# Altium PCB PCB1.PcbDoc
Units mil, origin at the board's own origin, x right, y up, seen from the top; angles counter-clockwise.
Board outline 1045 x 1985 mil, 2 copper layers (Top Layer, Bottom Layer); 7 components, 8 nets, 23 pads, 10 vias.
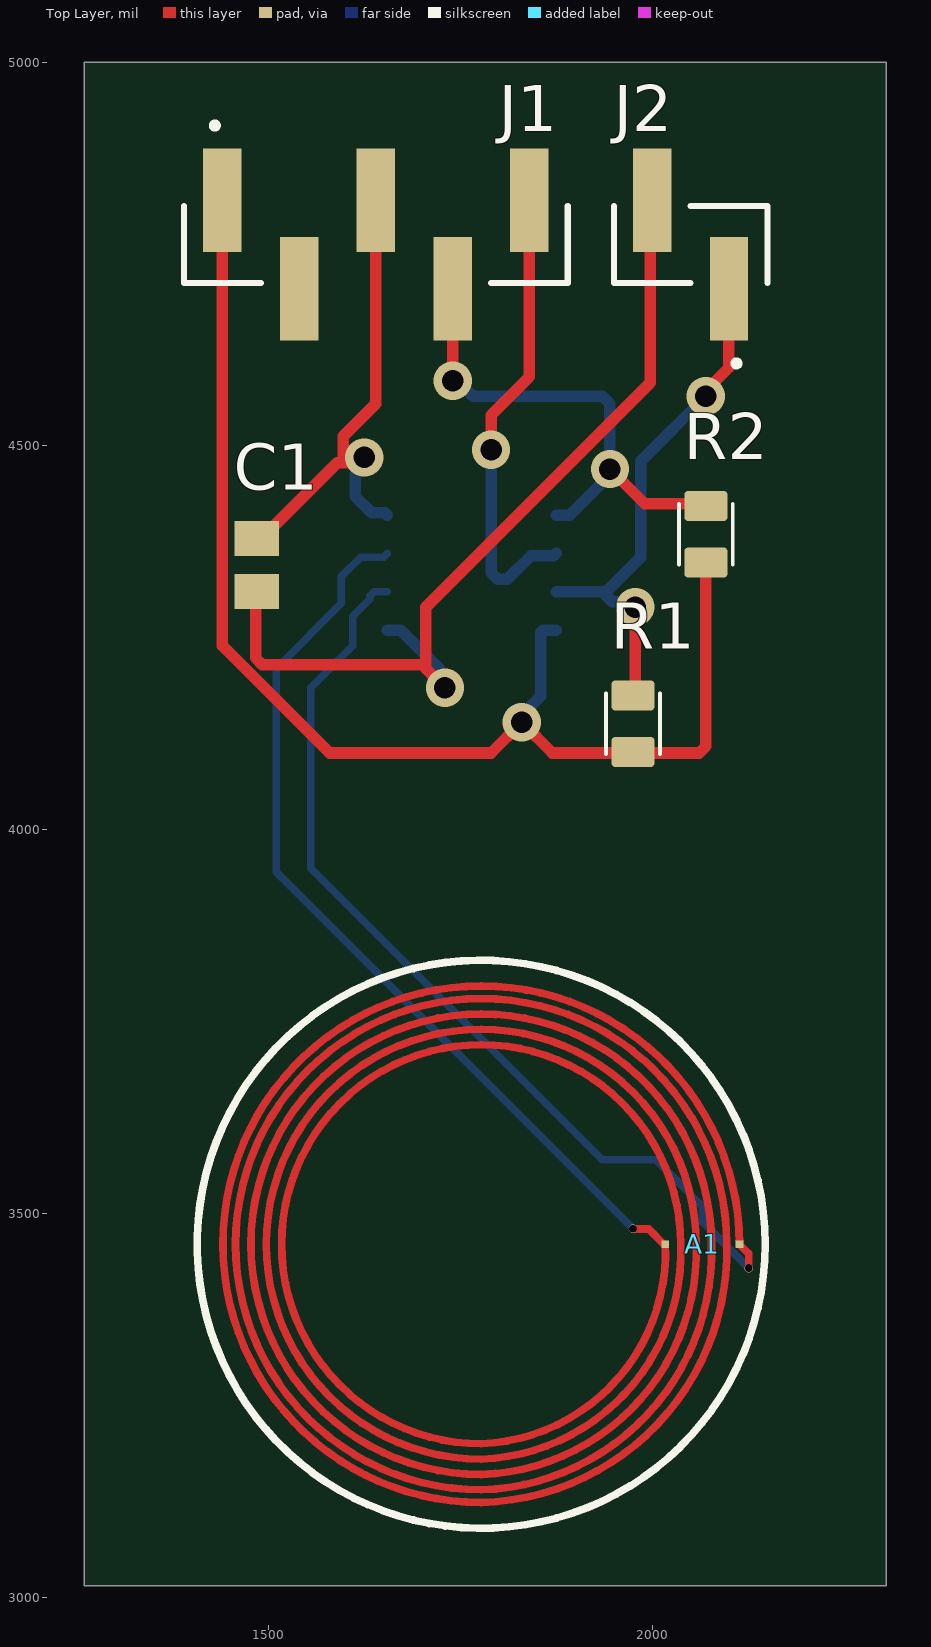
[diagram p0: Top Layer view]
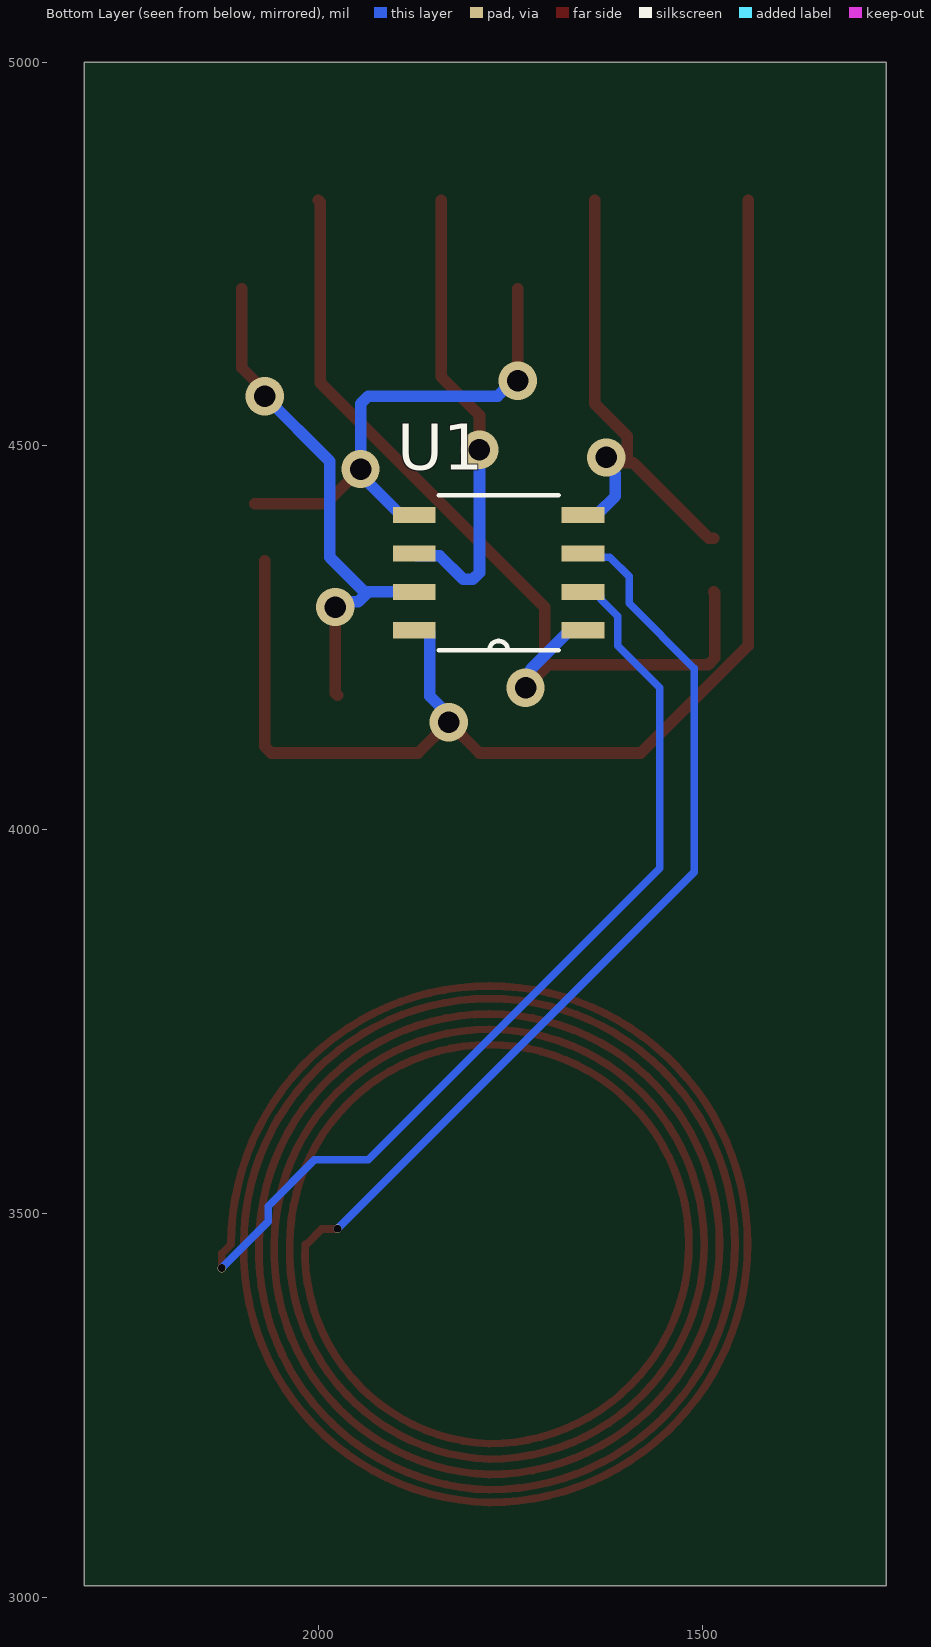
[diagram p1: Bottom Layer view, seen from below]

## Layer stack, top to bottom
Top Solder: solder mask 0.4, Solder Resist, Dk 3.5
Top Layer: signal copper 1.4
Dielectric 1: dielectric 12.6, FR-4, Dk 4.8
Bottom Layer: signal copper 1.4
Bottom Solder: solder mask 0.4, Solder Resist, Dk 3.5

## Board outline
1260,3015 2305,3015 2305,5000 1260,5000

## Design rules (kind name [scope] priority, off if disabled: settings)
Clearance [All] p1: gap=1 ignorepadtopadclearanceinfootprint=TRUE
NetAntennae [All] p1: netantennaetolerance=10
PolygonConnect [All] p1: connectstyle=Relief reliefconductorwidth=10 reliefentries=4 polygonreliefangle="90 Angle" airgapwidth=10
RoutingVias [All] p1: holewidth=28 width=50 viastyle="Through Hole" minholewidth=6 minwidth=6 maxholewidth=28 maxwidth=50
ShortCircuit [All] p1: allowed=TRUE
SilkToSolderMaskClearance [IsPad] p1: minsilkscreentomaskgap=0.1 clearancetoexposedcopper=FALSE
SolderMaskExpansion [All] p1: expansion=4 istentingtop=FALSE
Width [All] p1: maxlimit=20 minlimit=1 preferedwidth=10 minimp=50.000000 maximp=50.000000 favimp=50.000000
27 further rules are at their usual default settings.

## Components (designator, comment, footprint, x,y, rotation, side; value= is the part's Value field where it differs from the comment)
A1 "Antena 13.56 Mhz" PCB_ANTENNA 1777.2,3460 r0 top
C1 "10nF" CAPC2012X140N 1485,4345 r90 top
J1 "TSM-105-02-S-SV" SAMTEC_TSM-105-02-S-SV 1640,4762.52 r180 top
J2 "TSM-102-02-S-SV" SAMTEC_TSM-102-02-S-SV 2050,4762.52 r0 top
R1 "20K" RESC2012X65N 1975,4138.19 r270 top
R2 "open" RESC2012X65N 2070,4385 r270 top
U1 "M24LR64-RMN6/2" SOIC127P600X175-8N 1765,4335 r0 bottom

## Footprints (in the part's own frame and the unit in brackets; to place one, negate y for a bottom-side part, rotate by r counter-clockwise, add the part's x,y. Pads: shape width x height; smd on the part's side, far side on the other; paste and mask are expansions set on the pad)
CAPC2012X140N [mm]
  rect 1.16x1.47 smd: 1(-0.88,0) 2(0.88,0)
PCB_ANTENNA [mil]
  rect 10x10 smd: 1(336.44,0) 2(240,0)
  Top Layer lines w10: 240,0 cw(c-10,-10) 0,-260 cw(c0,0) -260,0 cw(c0,0) 0,260 cw(c0,0) 260,0 cw(c-10,-10) 0,-280 cw(c0,0) -280,0 cw(c0,0) 0,280 cw(c0,0) 280,0 cw(c-10,-10) 0,-300 cw(c0,0) -300,0 cw(c0,0) 0,300 cw(c0,0) 300,0 ; 336.44,0 ccw(c0,0) 0,336.44 ccw(c0,0) -336.44,0 ccw(c0,0) 0,-336.44 ccw(c-8.22,-8.22) 320,0 ; 300,0 ccw(c0,0) 300,0 ; 300,0 cw(c-10,-10) 0,-320 cw(c0,0) -320,0 cw(c0,0) 0,320 cw(c0,0) 320,0 ; 320,0 ccw(c0,0) 320,0
  silkscreen extent -370,-370 370,370
RESC2012X65N [mm]
  rrect25% 1x1.42 smd: 1(-0.935,0) 2(0.935,0)
  silkscreen extent -1,-0.89 1,0.89
SAMTEC_TSM-102-02-S-SV [mm]
  rect 1.27x3.43 smd: 01(1.27,-1.46) 02(-1.27,1.46)
  silkscreen extent -2.54,-4.03 2.54,1.27, body extent -2.54,-2.67 2.54,2.54, height 11.95
SAMTEC_TSM-105-02-S-SV [mm]
  rect 1.27x3.43 smd: 01(5.08,-1.46) 02(2.54,1.46) 03(0,-1.46) 04(-2.54,1.46) 05(-5.08,-1.46)
  silkscreen extent -6.35,-4.03 6.35,1.27, body extent -6.35,-2.6 6.35,2.6, height 11.95
SOIC127P600X175-8N [mil]
  rect 56x21 smd: 1(-110,75) 2(-110,25) 3(-110,-25) 4(-110,-75) 5(110,-75) 6(110,-25) 7(110,25) 8(110,75)
  silkscreen extent -78,-101 78,101, body extent -118,-96 118,96, height 60

## Part data
A1: library part PCB_ANTENNA, "Antenna 13.56 Mhz"
C1: library part 08053G334ZAT2A, "Cap Ceramic 10nF", Package=None, Availability=Unavailable, MP=08053G334ZAT2A, Price=None
J1: "Conn Unshrouded Header HDR 5 POS 2.54mm Solder ST SMD Tube", Package=None, Availability="In Stock", Check_prices=https://www.snapeda.com/parts/TSM-105-02-S-SV/Samtec/view-part/?ref=eda, MF=Samtec, MP=TSM-105-02-S-SV, Price=None, Purchase-URL=https://pricing.snapeda.com/search/part/TSM-105-02-S-SV/?ref=eda, SnapEDA_Link=https://www.snapeda.com/parts/TSM-105-02-S-SV/Samtec/view-part/?ref=snap
J2: "Conn Unshrouded Header HDR 2 POS 2.54mm Solder ST SMD T/R", Package=None, Availability=Unavailable, Check_prices=https://www.snapeda.com/parts/TSM-102-02-S-SV-P-TR/Samtec%20Inc./view-part/3255768/?ref=eda, MF="Samtec Inc.", MP=TSM-102-02-S-SV-P-TR, Price=None, Purchase-URL=https://pricing.snapeda.com/search/part/TSM-102-02-S-SV-P-TR/?ref=eda, SnapEDA_Link=https://www.snapeda.com/parts/TSM-102-02-S-SV-P-TR/Samtec%20Inc./view-part/3255768/?ref=snap
R1: library part 1676221-2, "RN 0805 20K 0.1% 10PPM 1KRL", Package=None, Availability=Unavailable, MP=1676221-2, Price=None
R2: library part 1676221-2, Package=None, Availability=Unavailable, MP=1676221-2, Price=None
U1: "64 Kbit EEPROM", Package=None, Availability=Unavailable, MP=M24LR64-RMN6-2, Price=None

## Via types
v1: diameter 50, hole 28, Top Layer to Bottom Layer, 8 vias
v2: diameter 11, hole 10, Top Layer to Bottom Layer, 2 vias

## Nets (pads, with @x,y where several pads share a name; then routed paths per layer and width w, separated by ;. In a path a pad name is that pad's centre, name@x,y a point inside that pad or via, vN(x,y) a via of type N, cw(c..) or ccw(c..) an arc to the next point about the centre after c; other vN are vias at no path point)
GND: C1.2 J1.03 U1.4 | length 643.6
  Top Layer w15: C1.2 1491.1,4379.65 1495.2,4383.74 1589.76,4478.3 1597.5,4478.3 1618.3,4478.3 v1(1625,4485) ; 1597.5,4485 1597.5,4512.5 1640,4555 J1.03
  Bottom Layer w15: v1(1625,4485) 1625,4475.53 1613.29,4463.82 1613.29,4434.21 1634.5,4413 1652,4413 U1.4
NetA1_1: A1.1 U1.2 | length 1246.3
  Top Layer w10: A1.1 2125.81,3447.84 2125.81,3429.19 v2(2126,3429)
  Bottom Layer w10: U1.2 1637.5,4310 1632,4304.5 1632,4300.14 1610,4278.14 1610,4240 1555,4185 1555,3950 1935,3570 2005,3570 2065.4,3509.6 2065.4,3489.6 v2(2126,3429)
NetA1_2: A1.2 U1.3 | length 1200.7
  Top Layer w10: v2(1975,3480) 1975.19,3479.81 1995.31,3479.81 2015.12,3460 A1.2
  Bottom Layer w10: U1.3 1650.14,4355.14 1620.14,4355.14 1595,4330 1595,4295 1510,4210 1510,3945 v2(1975,3480)
NetC1_1: C1.1 J2.02 U1.1 | length 1191.6
  Top Layer w15: C1.1 1483.18,4308.54 1483.18,4223.79 1491.97,4215 1700,4215 ; v1(1730,4185) 1705,4210 1705,4290 1997.5,4582.5 1997.5,4817.5 J2.02
  Bottom Layer w15: U1.1 1672.5,4260 1723.3,4209.2 1723.3,4191.7 v1(1730,4185)
NetJ1_04: J1.04 R2.1 U1.5 | length 670.4
  Top Layer w15: v1(1740,4585) J1.04 ; v1(1945,4470) 1990,4425 R2.1@2082.56,4425
  Bottom Layer w15: v1(1740,4585) 1746.29,4585 1766.29,4565 1935,4565 1945,4555 v1(1945,4470) ; U1.5 1892.5,4410 v1@1945,4462.5
NetJ1_05: J1.05 U1.6 | length 608.3
  Top Layer w15: v1(1790,4495) 1790,4540 1840,4590 J1.05
  Bottom Layer w15: v1(1790,4495) 1790,4335 1798.79,4326.21 1811.21,4326.21 1842,4357 1872,4357 U1.6
NetJ2_01: J2.01 R1.1 U1.7 | length 693.6
  Top Layer w15: R1.1 1977.74,4177.74 1977.74,4290.12 v1(1977.69,4290.18) ; v1(2070,4565) 2070,4572.18 2100,4602.18 J2.01
  Bottom Layer w15: U1.7 1892.5,4310 1940,4310 1985,4355 1985,4480 v1(2070,4565) ; 1935,4310 1948.13,4296.87 1970.99,4296.87 v1(1977.69,4290.18)
VCC: J1.01 R1.2 R2.2 U1.8 | length 1695.2
  Top Layer w15: J1.01 1440,4240 1580,4100 1790,4100 v1(1830,4140) 1870,4100 1975,4100 2061.21,4100 2070,4108.79 R2.2@2070,4350.31
  Bottom Layer w15: v1(1830,4140) 1830,4149.47 1854.5,4173.97 1854.5,4257 1857.5,4260 U1.8
pads on no net: J1.02

## Silkscreen, mask and mechanical layers (free items; w line width, h text height)
Board:
  the board outline again, w15